# EAGLE board MRCS-Occupancy-Display-array (EAGLE 7.7.0)
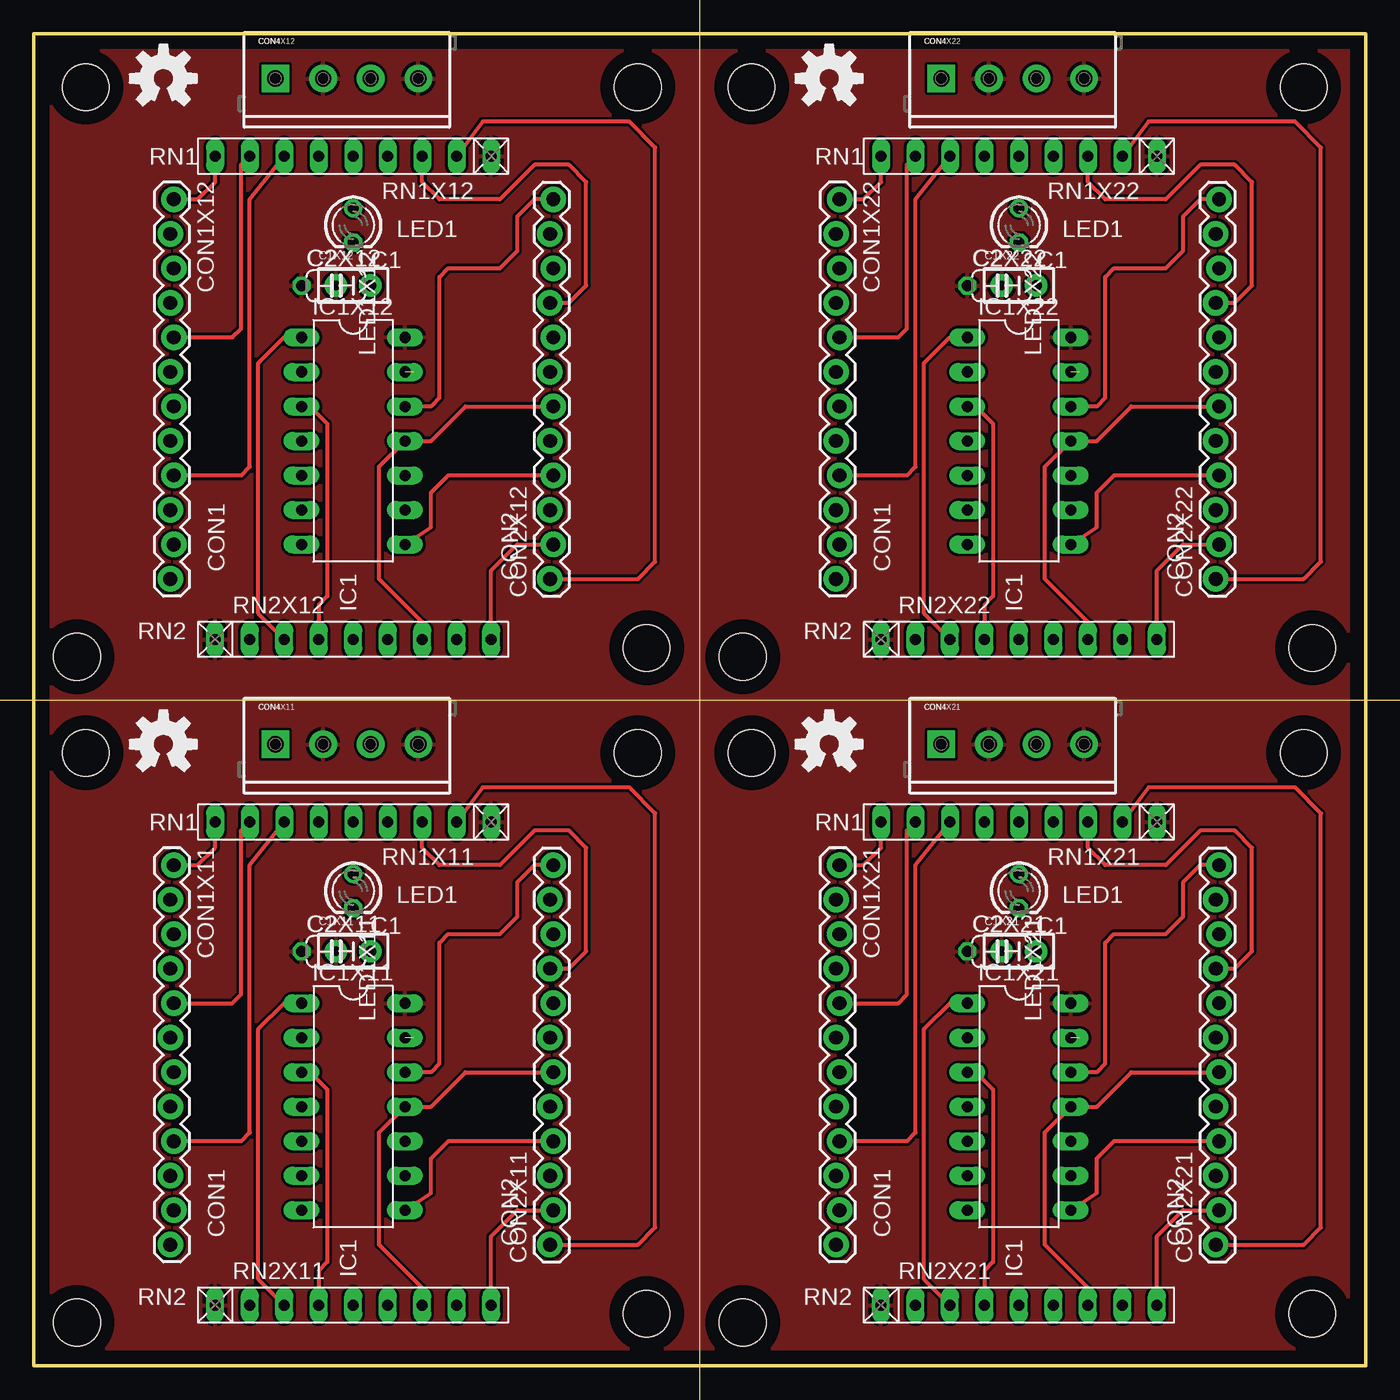
[diagram p0: board, top side]
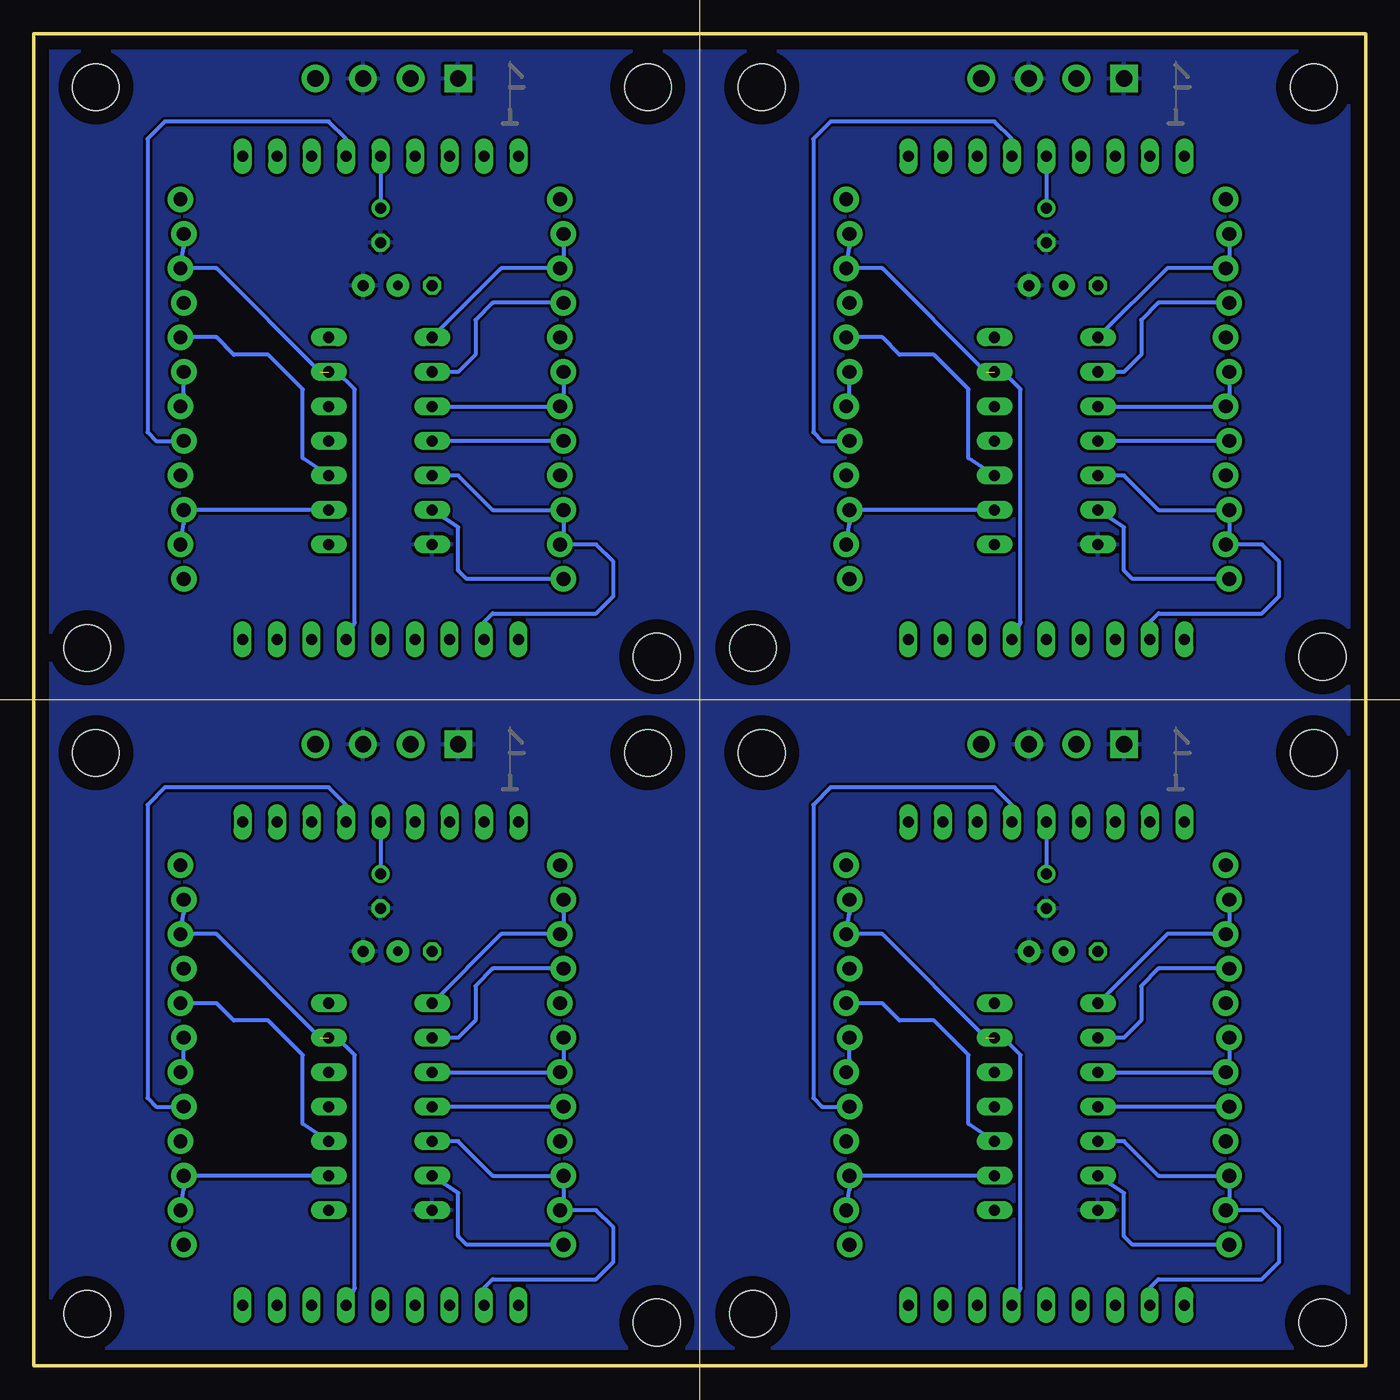
[diagram p1: board, bottom side, seen from below]

Size 98 x 98 mm. Coordinates in mm from the lower left corner, seen from the top.
Outline: 0,0 98,0 98,98 0,98 0,0
Copper layers (1*16): Top 0.035mm / dielectric 1.5mm / Bottom 0.035mm
Design rules "default": minimum track width 10mil, minimum drill 24mil, track to track 8mil, track to pad 8mil, pad to pad 8mil, via to via 8mil, smd to smd 8mil, copper to edge 40mil, drill to drill 8mil, minimum pad ring 10mil, minimum via ring 8mil, stop-mask expansion 4mil, vias tented up to drill 0mil, thermal gap 10mil
Holes 3.45 mm at 3.81,45.09 44.45,45.09 45.09,3.81 3.17,3.17 3.81,94.08 44.45,94.08 45.09,52.81 3.17,52.17 52.81,45.09 93.45,45.09 94.08,3.81 52.17,3.17 52.81,94.08 93.45,94.08 94.08,52.81 52.17,52.17
Milling: 2 lines

## Footprints (pad centres in the part's own frame; a part is rotated, then mirrored left to right if it is on the bottom)
C-PTH-0.100 = drill 0.7 pad 1.651: 1 -1.27,0; 2 1.27,0
C050-024X044 = drill 0.813 octagon: 1 -2.54,0; 2 2.54,0
1X12_LOCK = drill 1.016 pad 1.88: 1 0,0.127; 2 2.54,-0.127; 3 5.08,0.127; 4 7.62,-0.127; 5 10.16,0.127; 6 12.7,-0.127; 7 15.24,0.127; 8 17.78,-0.127; 9 20.32,0.127; 10 22.86,-0.127; 11 25.4,0.127; 12 27.94,-0.127
SCREWTERMINAL-3.5MM-4 = drill 1.2 pad 2.032 square: 1 0,0 | drill 1.2 pad 2.032: 2 3.5,0; 3 7,0; 4 10.5,0
DIL14 = drill 0.813 long: 1 -7.62,-3.81; 2 -5.08,-3.81; 3 -2.54,-3.81; 4 0,-3.81; 5 2.54,-3.81; 6 5.08,-3.81; 7 7.62,-3.81; 8 7.62,3.81; 9 5.08,3.81; 10 2.54,3.81; 11 0,3.81; 12 -2.54,3.81; 13 -5.08,3.81; 14 -7.62,3.81
LED3MM = drill 0.813: A 1.27,0 | drill 0.813 octagon: K -1.27,0
RN-9 = drill 0.813 long: 1 -10.16,0; 2 -7.62,0; 3 -5.08,0; 4 -2.54,0; 5 0,0; 6 2.54,0; 7 5.08,0; 8 7.62,0; 9 10.16,0

## Placement (x,y rotation side)
C1X11  0.1 uF  [C-PTH-0.100]  23.5,30.48 0 top
C1X12  0.1 uF  [C-PTH-0.100]  23.5,79.48 0 top
C1X21  0.1 uF  [C-PTH-0.100]  72.5,30.48 0 top
C1X22  0.1 uF  [C-PTH-0.100]  72.5,79.48 0 top
C2X11  0.1 uF  [C050-024X044]  22.23,30.48 0 top
C2X12  0.1 uF  [C050-024X044]  22.23,79.48 0 top
C2X21  0.1 uF  [C050-024X044]  71.22,30.48 0 top
C2X22  0.1 uF  [C050-024X044]  71.22,79.48 0 top
CON1X11  CONNECTOR-M12LOCK  [1X12_LOCK]  10.16,36.83 270 top
CON1X12  CONNECTOR-M12LOCK  [1X12_LOCK]  10.16,85.83 270 top
CON1X21  CONNECTOR-M12LOCK  [1X12_LOCK]  59.16,36.83 270 top
CON1X22  CONNECTOR-M12LOCK  [1X12_LOCK]  59.16,85.83 270 top
CON2X11  CONNECTOR-M12LOCK  [1X12_LOCK]  38.1,8.89 90 top
CON2X12  CONNECTOR-M12LOCK  [1X12_LOCK]  38.1,57.89 90 top
CON2X21  CONNECTOR-M12LOCK  [1X12_LOCK]  87.1,8.89 90 top
CON2X22  CONNECTOR-M12LOCK  [1X12_LOCK]  87.1,57.89 90 top
CON4X11  [SCREWTERMINAL-3.5MM-4]  17.78,45.72 0 top
CON4X12  [SCREWTERMINAL-3.5MM-4]  17.78,94.72 0 top
CON4X21  [SCREWTERMINAL-3.5MM-4]  66.78,45.72 0 top
CON4X22  [SCREWTERMINAL-3.5MM-4]  66.78,94.72 0 top
IC1X11  74ALS04N  [DIL14]  23.5,19.05 270 top
IC1X12  74ALS04N  [DIL14]  23.5,68.05 270 top
IC1X21  74ALS04N  [DIL14]  72.5,19.05 270 top
IC1X22  74ALS04N  [DIL14]  72.5,68.05 270 top
LED1X11  [LED3MM]  23.5,34.92 90 top
LED1X12  [LED3MM]  23.5,83.92 90 top
LED1X21  [LED3MM]  72.5,34.92 90 top
LED1X22  [LED3MM]  72.5,83.92 90 top
OSHW1X11  DOC-OSHW-LOGO-M  [OSHW-LOGO-M]  9.53,45.72 0 top
OSHW1X12  DOC-OSHW-LOGO-M  [OSHW-LOGO-M]  9.53,94.72 0 top
OSHW1X21  DOC-OSHW-LOGO-M  [OSHW-LOGO-M]  58.52,45.72 0 top
OSHW1X22  DOC-OSHW-LOGO-M  [OSHW-LOGO-M]  58.52,94.72 0 top
RN1X11  470  [RN-9]  23.5,40.01 180 top
RN1X12  470  [RN-9]  23.5,89 180 top
RN1X21  470  [RN-9]  72.5,40.01 180 top
RN1X22  470  [RN-9]  72.5,89 180 top
RN2X11  4.7K  [RN-9]  23.5,4.45 0 top
RN2X12  4.7K  [RN-9]  23.5,53.45 0 top
RN2X21  4.7K  [RN-9]  72.5,4.45 0 top
RN2X22  4.7K  [RN-9]  72.5,53.45 0 top
U$1X11  [CA-PROP65WARNING]  45.09,25.4 90 top
U$1X12  [CA-PROP65WARNING]  45.09,74.4 90 top
U$1X21  [CA-PROP65WARNING]  94.08,25.4 90 top
U$1X22  [CA-PROP65WARNING]  94.08,74.4 90 top
U$2X11  [MRCSLOGOBTM]  7.62,41.91 0 top
U$2X12  [MRCSLOGOBTM]  7.62,90.91 0 top
U$2X21  [MRCSLOGOBTM]  56.62,41.91 0 top
U$2X22  [MRCSLOGOBTM]  56.62,90.91 0 top

## Library data of the parts
C1X11 C1X12 C1X21 C1X22 C2X11 C2X12 C2X21 C2X22 CON1X11 CON1X12 CON1X21 CON1X22 CON2X11 CON2X12 CON2X21 CON2X22 CON4X11 CON4X12 CON4X21 CON4X22 LED1X11 LED1X12 LED1X21 LED1X22 OSHW1X11 OSHW1X12 OSHW1X21 OSHW1X22 = SPCoast
IC1X11 IC1X12 IC1X21 IC1X22 = 74xx-us
RN1X11 RN1X12 RN1X21 RN1X22 RN2X11 RN2X12 RN2X21 RN2X22 = resistor-net
U$1X11 U$1X12 U$1X21 U$1X22 = MRCS-prop65warningBtm
U$2X11 U$2X12 U$2X21 U$2X22 = MRCSLogoBtm

## Nets
GNDX11: C1X11.2 C2X11.2 CON4X11.1 CON4X11.3 IC1X11.7 LED1X11.K
GNDX12: C1X12.2 C2X12.2 CON4X12.1 CON4X12.3 IC1X12.7 LED1X12.K
GNDX21: C1X21.2 C2X21.2 CON4X21.1 CON4X21.3 IC1X21.7 LED1X21.K
GNDX22: C1X22.2 C2X22.2 CON4X22.1 CON4X22.3 IC1X22.7 LED1X22.K
N$2X11: CON1X11.10 CON1X11.11 IC1X11.5 RN2X11.2
N$2X12: CON1X12.10 CON1X12.11 IC1X12.5 RN2X12.2
N$2X21: CON1X21.10 CON1X21.11 IC1X21.5 RN2X21.2
N$2X22: CON1X22.10 CON1X22.11 IC1X22.5 RN2X22.2
N$3X11: CON1X11.1 RN1X11.9
N$3X12: CON1X12.1 RN1X12.9
N$3X21: CON1X21.1 RN1X21.9
N$3X22: CON1X22.1 RN1X22.9
N$4X11: CON1X11.4 IC1X11.2
N$4X12: CON1X12.4 IC1X12.2
N$4X21: CON1X21.4 IC1X21.2
N$4X22: CON1X22.4 IC1X22.2
N$5X11: CON1X11.6 CON1X11.7 IC1X11.3 RN2X11.4
N$5X12: CON1X12.6 CON1X12.7 IC1X12.3 RN2X12.4
N$5X21: CON1X21.6 CON1X21.7 IC1X21.3 RN2X21.4
N$5X22: CON1X22.6 CON1X22.7 IC1X22.3 RN2X22.4
N$6X11: CON1X11.12 IC1X11.6
N$6X12: CON1X12.12 IC1X12.6
N$6X21: CON1X21.12 IC1X21.6
N$6X22: CON1X22.12 IC1X22.6
N$7X11: CON1X11.8 IC1X11.4
N$7X12: CON1X12.8 IC1X12.4
N$7X21: CON1X21.8 IC1X21.4
N$7X22: CON1X22.8 IC1X22.4
N$8X11: CON1X11.5 RN1X11.8
N$8X12: CON1X12.5 RN1X12.8
N$8X21: CON1X21.5 RN1X21.8
N$8X22: CON1X22.5 RN1X22.8
N$9X11: CON2X11.2 CON2X11.3 IC1X11.9 RN2X11.9
N$9X12: CON2X12.2 CON2X12.3 IC1X12.9 RN2X12.9
N$9X21: CON2X21.2 CON2X21.3 IC1X21.9 RN2X21.9
N$9X22: CON2X22.2 CON2X22.3 IC1X22.9 RN2X22.9
N$10X11: CON1X11.9 RN1X11.7
N$10X12: CON1X12.9 RN1X12.7
N$10X21: CON1X21.9 RN1X21.7
N$10X22: CON1X22.9 RN1X22.7
N$11X11: CON2X11.8 IC1X11.10
N$11X12: CON2X12.8 IC1X12.10
N$11X21: CON2X21.8 IC1X21.10
N$11X22: CON2X22.8 IC1X22.10
N$12X11: CON2X11.12 IC1X11.12
N$12X12: CON2X12.12 IC1X12.12
N$12X21: CON2X21.12 IC1X21.12
N$12X22: CON2X22.12 IC1X22.12
N$13X11: CON2X11.4 IC1X11.8
N$13X12: CON2X12.4 IC1X12.8
N$13X21: CON2X21.4 IC1X21.8
N$13X22: CON2X22.4 IC1X22.8
N$14X11: CON2X11.1 RN1X11.2
N$14X12: CON2X12.1 RN1X12.2
N$14X21: CON2X21.1 RN1X21.2
N$14X22: CON2X22.1 RN1X22.2
N$15X11: CON2X11.5 RN1X11.4
N$15X12: CON2X12.5 RN1X12.4
N$15X21: CON2X21.5 RN1X21.4
N$15X22: CON2X22.5 RN1X22.4
N$16X11: CON1X11.2 CON1X11.3 IC1X11.1 RN2X11.3
N$16X12: CON1X12.2 CON1X12.3 IC1X12.1 RN2X12.3
N$16X21: CON1X21.2 CON1X21.3 IC1X21.1 RN2X21.3
N$16X22: CON1X22.2 CON1X22.3 IC1X22.1 RN2X22.3
N$17X11: LED1X11.A RN1X11.5
N$17X12: LED1X12.A RN1X12.5
N$17X21: LED1X21.A RN1X21.5
N$17X22: LED1X22.A RN1X22.5
N$18X11: CON2X11.6 CON2X11.7 IC1X11.11 RN2X11.7
N$18X12: CON2X12.6 CON2X12.7 IC1X12.11 RN2X12.7
N$18X21: CON2X21.6 CON2X21.7 IC1X21.11 RN2X21.7
N$18X22: CON2X22.6 CON2X22.7 IC1X22.11 RN2X22.7
N$19X11: CON2X11.9 RN1X11.3
N$19X12: CON2X12.9 RN1X12.3
N$19X21: CON2X21.9 RN1X21.3
N$19X22: CON2X22.9 RN1X22.3
N$20X11: CON2X11.10 CON2X11.11 IC1X11.13 RN2X11.6
N$20X12: CON2X12.10 CON2X12.11 IC1X12.13 RN2X12.6
N$20X21: CON2X21.10 CON2X21.11 IC1X21.13 RN2X21.6
N$20X22: CON2X22.10 CON2X22.11 IC1X22.13 RN2X22.6
VCCX11: C1X11.1 C2X11.1 CON4X11.2 CON4X11.4 IC1X11.14 RN1X11.1 RN2X11.1
VCCX12: C1X12.1 C2X12.1 CON4X12.2 CON4X12.4 IC1X12.14 RN1X12.1 RN2X12.1
VCCX21: C1X21.1 C2X21.1 CON4X21.2 CON4X21.4 IC1X21.14 RN1X21.1 RN2X21.1
VCCX22: C1X22.1 C2X22.1 CON4X22.2 CON4X22.4 IC1X22.14 RN1X22.1 RN2X22.1

## Tracks (layer width: path | path; a pad name or v marks a point on that pad's centre or on a via)
GNDX11
  pour Bottom: 0,0 49,0 48.9,48.9 0,48.9
GNDX12
  pour Bottom: 0,49 49,49 48.9,97.89 0,97.89
GNDX21
  pour Bottom: 49,0 98,0 97.89,48.9 49,48.9
GNDX22
  pour Bottom: 49,49 98,49 97.89,97.89 49,97.89
N$2X11
  Bottom 0.305: IC1X11.5 17.78,16.51 15.24,13.97 CON1X11.10 10.03,12.32 CON1X11.11 7.62,11.43 6.35,10.16 6.35,7.62 7.62,6.35 15.24,6.35 15.88,5.71 RN2X11.2
N$2X12
  Bottom 0.305: IC1X12.5 17.78,65.51 15.24,62.97 CON1X12.10 10.03,61.32 CON1X12.11 7.62,60.43 6.35,59.16 6.35,56.62 7.62,55.35 15.24,55.35 15.88,54.72 RN2X12.2
N$2X21
  Bottom 0.305: IC1X21.5 66.78,16.51 64.24,13.97 CON1X21.10 59.03,12.32 CON1X21.11 56.62,11.43 55.35,10.16 55.35,7.62 56.62,6.35 64.24,6.35 64.88,5.71 RN2X21.2
N$2X22
  Bottom 0.305: IC1X22.5 66.78,65.51 64.24,62.97 CON1X22.10 59.03,61.32 CON1X22.11 56.62,60.43 55.35,59.16 55.35,56.62 56.62,55.35 64.24,55.35 64.88,54.72 RN2X22.2
N$3X11
  Top 0.305: CON1X11.1 12.06,36.83 13.34,38.1 RN1X11.9
N$3X12
  Top 0.305: CON1X12.1 12.06,85.83 13.34,87.1 RN1X12.9
N$3X21
  Top 0.305: CON1X21.1 61.06,36.83 62.34,38.1 RN1X21.9
N$3X22
  Top 0.305: CON1X22.1 61.06,85.83 62.34,87.1 RN1X22.9
N$4X11
  Bottom 0.305: CON1X11.4 15.24,29.21 16.51,27.94 16.51,25.4 17.78,24.13 IC1X11.2
N$4X12
  Bottom 0.305: CON1X12.4 15.24,78.21 16.51,76.94 16.51,74.4 17.78,73.13 IC1X12.2
N$4X21
  Bottom 0.305: CON1X21.4 64.24,29.21 65.51,27.94 65.51,25.4 66.78,24.13 IC1X21.2
N$4X22
  Bottom 0.305: CON1X22.4 64.24,78.21 65.51,76.94 65.51,74.4 66.78,73.13 IC1X22.2
N$5X11
  Top 0.305: IC1X11.3 20.32,21.59 21.59,20.32 21.59,7.62 20.95,6.99 RN2X11.4
  Bottom 0.305: CON1X11.6 10.03,21.84 CON1X11.7 IC1X11.3
N$5X12
  Top 0.305: IC1X12.3 20.32,70.59 21.59,69.32 21.59,56.62 20.95,55.98 RN2X12.4
  Bottom 0.305: CON1X12.6 10.03,70.84 CON1X12.7 IC1X12.3
N$5X21
  Top 0.305: IC1X21.3 69.32,21.59 70.59,20.32 70.59,7.62 69.95,6.99 RN2X21.4
  Bottom 0.305: CON1X21.6 59.03,21.84 CON1X21.7 IC1X21.3
N$5X22
  Top 0.305: IC1X22.3 69.32,70.59 70.59,69.32 70.59,56.62 69.95,55.98 RN2X22.4
  Bottom 0.305: CON1X22.6 59.03,70.84 CON1X22.7 IC1X22.3
N$6X11
  Bottom 0.305: CON1X11.12 17.14,8.89 17.78,9.53 17.78,12.7 IC1X11.6
N$6X12
  Bottom 0.305: CON1X12.12 17.14,57.89 17.78,58.52 17.78,61.7 IC1X12.6
N$6X21
  Bottom 0.305: CON1X21.12 66.14,8.89 66.78,9.53 66.78,12.7 IC1X21.6
N$6X22
  Bottom 0.305: CON1X22.12 66.14,57.89 66.78,58.52 66.78,61.7 IC1X22.6
N$7X11
  Bottom 0.305: CON1X11.8 IC1X11.4
N$7X12
  Bottom 0.305: CON1X12.8 IC1X12.4
N$7X21
  Bottom 0.305: CON1X21.8 IC1X21.4
N$7X22
  Bottom 0.305: CON1X22.8 IC1X22.4
N$8X11
  Top 0.305: RN1X11.8 15.24,39.37 15.24,27.3 14.61,26.67 CON1X11.5
N$8X12
  Top 0.305: RN1X12.8 15.24,88.37 15.24,76.31 14.61,75.67 CON1X12.5
N$8X21
  Top 0.305: RN1X21.8 64.24,39.37 64.24,27.3 63.6,26.67 CON1X21.5
N$8X22
  Top 0.305: RN1X22.8 64.24,88.37 64.24,76.31 63.6,75.67 CON1X22.5
N$9X11
  Top 0.305: RN2X11.9 33.66,9.53 35.56,11.43 CON2X11.2
  Bottom 0.305: CON2X11.2 37.97,12.95 CON2X11.3 IC1X11.9
N$9X12
  Top 0.305: RN2X12.9 33.66,58.52 35.56,60.43 CON2X12.2
  Bottom 0.305: CON2X12.2 37.97,61.95 CON2X12.3 IC1X12.9
N$9X21
  Top 0.305: RN2X21.9 82.66,9.53 84.56,11.43 CON2X21.2
  Bottom 0.305: CON2X21.2 86.97,12.95 CON2X21.3 IC1X21.9
N$9X22
  Top 0.305: RN2X22.9 82.66,58.52 84.56,60.43 CON2X22.2
  Bottom 0.305: CON2X22.2 86.97,61.95 CON2X22.3 IC1X22.9
N$10X11
  Top 0.305: CON1X11.9 15.24,16.51 15.88,17.14 15.88,36.83 RN1X11.7
N$10X12
  Top 0.305: CON1X12.9 15.24,65.51 15.88,66.14 15.88,85.83 RN1X12.7
N$10X21
  Top 0.305: CON1X21.9 64.24,16.51 64.88,17.14 64.88,36.83 RN1X21.7
N$10X22
  Top 0.305: CON1X22.9 64.24,65.51 64.88,66.14 64.88,85.83 RN1X22.7
N$11X11
  Bottom 0.305: IC1X11.10 29.21,17.78 29.21,22.86 31.75,25.4 34.29,25.4 35.56,26.67 CON2X11.8
N$11X12
  Bottom 0.305: IC1X12.10 29.21,66.78 29.21,71.86 31.75,74.4 34.29,74.4 35.56,75.67 CON2X12.8
N$11X21
  Bottom 0.305: IC1X21.10 78.21,17.78 78.21,22.86 80.75,25.4 83.29,25.4 84.56,26.67 CON2X21.8
N$11X22
  Bottom 0.305: IC1X22.10 78.21,66.78 78.21,71.86 80.75,74.4 83.29,74.4 84.56,75.67 CON2X22.8
N$12X11
  Top 0.305: CON2X11.12 36.83,36.83 35.56,35.56 35.56,33.02 34.29,31.75 30.48,31.75 29.84,31.11 29.84,22.23 29.21,21.59 IC1X11.12
N$12X12
  Top 0.305: CON2X12.12 36.83,85.83 35.56,84.56 35.56,82.02 34.29,80.75 30.48,80.75 29.84,80.11 29.84,71.22 29.21,70.59 IC1X12.12
N$12X21
  Top 0.305: CON2X21.12 85.83,36.83 84.56,35.56 84.56,33.02 83.29,31.75 79.48,31.75 78.84,31.11 78.84,22.23 78.21,21.59 IC1X21.12
N$12X22
  Top 0.305: CON2X22.12 85.83,85.83 84.56,84.56 84.56,82.02 83.29,80.75 79.48,80.75 78.84,80.11 78.84,71.22 78.21,70.59 IC1X22.12
N$13X11
  Top 0.305: CON2X11.4 30.48,16.51 29.21,15.24 29.21,12.7 IC1X11.8
N$13X12
  Top 0.305: CON2X12.4 30.48,65.51 29.21,64.24 29.21,61.7 IC1X12.8
N$13X21
  Top 0.305: CON2X21.4 79.48,16.51 78.21,15.24 78.21,12.7 IC1X21.8
N$13X22
  Top 0.305: CON2X22.4 79.48,65.51 78.21,64.24 78.21,61.7 IC1X22.8
N$14X11
  Top 0.305: CON2X11.1 44.45,8.89 45.72,10.16 45.72,40.64 43.81,42.55 33.02,42.55 RN1X11.2
N$14X12
  Top 0.305: CON2X12.1 44.45,57.89 45.72,59.16 45.72,89.64 43.81,91.55 33.02,91.55 RN1X12.2
N$14X21
  Top 0.305: CON2X21.1 93.45,8.89 94.72,10.16 94.72,40.64 92.81,42.55 82.02,42.55 RN1X21.2
N$14X22
  Top 0.305: CON2X22.1 93.45,57.89 94.72,59.16 94.72,89.64 92.81,91.55 82.02,91.55 RN1X22.2
N$15X11
  Bottom 0.305: RN1X11.4 26.04,41.27 27.3,42.55 39.37,42.55 40.64,41.27 40.64,19.68 40.01,19.05 CON2X11.5
N$15X12
  Bottom 0.305: RN1X12.4 26.04,90.28 27.3,91.55 39.37,91.55 40.64,90.28 40.64,68.69 40.01,68.05 CON2X12.5
N$15X21
  Bottom 0.305: RN1X21.4 75.03,41.27 76.31,42.55 88.37,42.55 89.64,41.27 89.64,19.68 89,19.05 CON2X21.5
N$15X22
  Bottom 0.305: RN1X22.4 75.03,90.28 76.31,91.55 88.37,91.55 89.64,90.28 89.64,68.69 89,68.05 CON2X22.5
N$16X11
  Top 0.305: RN2X11.3 16.51,6.35 16.51,24.77 18.41,26.67 IC1X11.1
  Bottom 0.305: CON1X11.2 10.03,32 CON1X11.3 14.61,31.75 IC1X11.1
N$16X12
  Top 0.305: RN2X12.3 16.51,55.35 16.51,73.77 18.41,75.67 IC1X12.1
  Bottom 0.305: CON1X12.2 10.03,81 CON1X12.3 14.61,80.75 IC1X12.1
N$16X21
  Top 0.305: RN2X21.3 65.51,6.35 65.51,24.77 67.42,26.67 IC1X21.1
  Bottom 0.305: CON1X21.2 59.03,32 CON1X21.3 63.6,31.75 IC1X21.1
N$16X22
  Top 0.305: RN2X22.3 65.51,55.35 65.51,73.77 67.42,75.67 IC1X22.1
  Bottom 0.305: CON1X22.2 59.03,81 CON1X22.3 63.6,80.75 IC1X22.1
N$17X11
  Bottom 0.305: RN1X11.5 LED1X11.A
N$17X12
  Bottom 0.305: RN1X12.5 LED1X12.A
N$17X21
  Bottom 0.305: RN1X21.5 LED1X21.A
N$17X22
  Bottom 0.305: RN1X22.5 LED1X22.A
N$18X11
  Top 0.305: CON2X11.6 31.75,21.59 29.21,19.05 IC1X11.11 25.4,17.14 25.4,8.89 28.57,5.71 RN2X11.7
  Bottom 0.305: CON2X11.6 37.97,22.48 CON2X11.7
N$18X12
  Top 0.305: CON2X12.6 31.75,70.59 29.21,68.05 IC1X12.11 25.4,66.14 25.4,57.89 28.57,54.72 RN2X12.7
  Bottom 0.305: CON2X12.6 37.97,71.48 CON2X12.7
N$18X21
  Top 0.305: CON2X21.6 80.75,21.59 78.21,19.05 IC1X21.11 74.4,17.14 74.4,8.89 77.58,5.71 RN2X21.7
  Bottom 0.305: CON2X21.6 86.97,22.48 CON2X21.7
N$18X22
  Top 0.305: CON2X22.6 80.75,70.59 78.21,68.05 IC1X22.11 74.4,66.14 74.4,57.89 77.58,54.72 RN2X22.7
  Bottom 0.305: CON2X22.6 86.97,71.48 CON2X22.7
N$19X11
  Top 0.305: CON2X11.9 39.37,29.21 40.64,30.48 40.64,38.1 39.37,39.37 36.83,39.37 34.29,36.83 29.84,36.83 28.57,38.1 RN1X11.3
N$19X12
  Top 0.305: CON2X12.9 39.37,78.21 40.64,79.48 40.64,87.1 39.37,88.37 36.83,88.37 34.29,85.83 29.84,85.83 28.57,87.1 RN1X12.3
N$19X21
  Top 0.305: CON2X21.9 88.37,29.21 89.64,30.48 89.64,38.1 88.37,39.37 85.83,39.37 83.29,36.83 78.84,36.83 77.58,38.1 RN1X21.3
N$19X22
  Top 0.305: CON2X22.9 88.37,78.21 89.64,79.48 89.64,87.1 88.37,88.37 85.83,88.37 83.29,85.83 78.84,85.83 77.58,87.1 RN1X22.3
N$20X11  (1 unrouted)
  Bottom 0.305: CON2X11.11 37.97,33.27 CON2X11.10 35.56,31.75 27.94,24.13 26.67,24.13 25.4,22.86 25.4,5.71 RN2X11.6
N$20X12  (1 unrouted)
  Bottom 0.305: CON2X12.11 37.97,82.27 CON2X12.10 35.56,80.75 27.94,73.13 26.67,73.13 25.4,71.86 25.4,54.72 RN2X12.6
N$20X21  (1 unrouted)
  Bottom 0.305: CON2X21.11 86.97,33.27 CON2X21.10 84.56,31.75 76.94,24.13 75.67,24.13 74.4,22.86 74.4,5.71 RN2X21.6
N$20X22  (1 unrouted)
  Bottom 0.305: CON2X22.11 86.97,82.27 CON2X22.10 84.56,80.75 76.94,73.13 75.67,73.13 74.4,71.86 74.4,54.72 RN2X22.6
VCCX11
  pour Top: 0,0 49,0 49,48.9 0,48.9
VCCX12
  pour Top: 0,49 49,49 49,97.89 0,97.89
VCCX21
  pour Top: 49,0 98,0 98,48.9 49,48.9
VCCX22
  pour Top: 49,49 98,49 98,97.89 49,97.89

## Text on the board
Milling: V-Score | V-Score
tDocu: G 5 G 5 | G 5 G 5 | CROG / ADDN | CROG / ADDN | CROG / ADDN | CROG / ADDN | CROG / ADDN | CROG / ADDN | CROG / ADDN | CROG / ADDN | CROG / ADDN | CROG / ADDN | CROG / ADDN | CROG / ADDN | G 5 G 5 | G 5 G 5 | CROG / ADDN | CROG / ADDN | CROG / ADDN | CROG / ADDN | CROG / ADDN | CROG / ADDN | CROG / ADDN | CROG / ADDN | CROG / ADDN | CROG / ADDN | CROG / ADDN | CROG / ADDN
bDocu: BiPolar LED Occupancy | BiPolar LED Occupancy | V 1.1 / 20231103 | Seth Neumann / Allison Dendy | V 1.1 / 20231103 | Seth Neumann / Allison Dendy | BiPolar LED Occupancy | BiPolar LED Occupancy | V 1.1 / 20231103 | Seth Neumann / Allison Dendy | V 1.1 / 20231103 | Seth Neumann / Allison Dendy
_tNames: CON4 | CON4 | CON4 | CON4 | RN1 | RN1 | LED1 | LED1 | C2 | C2 | C1 | C2 | C2 | C1 | CON1 | CON2 | CON1 | CON2 | IC1 | IC1 | RN2 | RN2 | CON4 | CON4 | CON4 | CON4 | RN1 | RN1 | LED1 | LED1 | C2 | C2 | C1 | C2 | C2 | C1 | CON1 | CON2 | CON1 | CON2 | IC1 | IC1 | RN2 | RN2